# Altium PCB MGMEZZ04.PcbDoc (part 3 of 9)
Units mil, origin at the board's own origin, x right, y up, seen from the top; angles counter-clockwise.
Board outline 3790 x 5472.44 mil, 10 copper layers (TopLayer, InternalPlane1, MidLayer1, InternalPlane2, MidLayer2, MidLayer3, InternalPlane3, MidLayer4, InternalPlane4, BottomLayer), stack 57.08 mil thick; 846 components, 745 nets, 3323 pads, 1906 vias.
Unrouted connection lines stored in the file: 128.
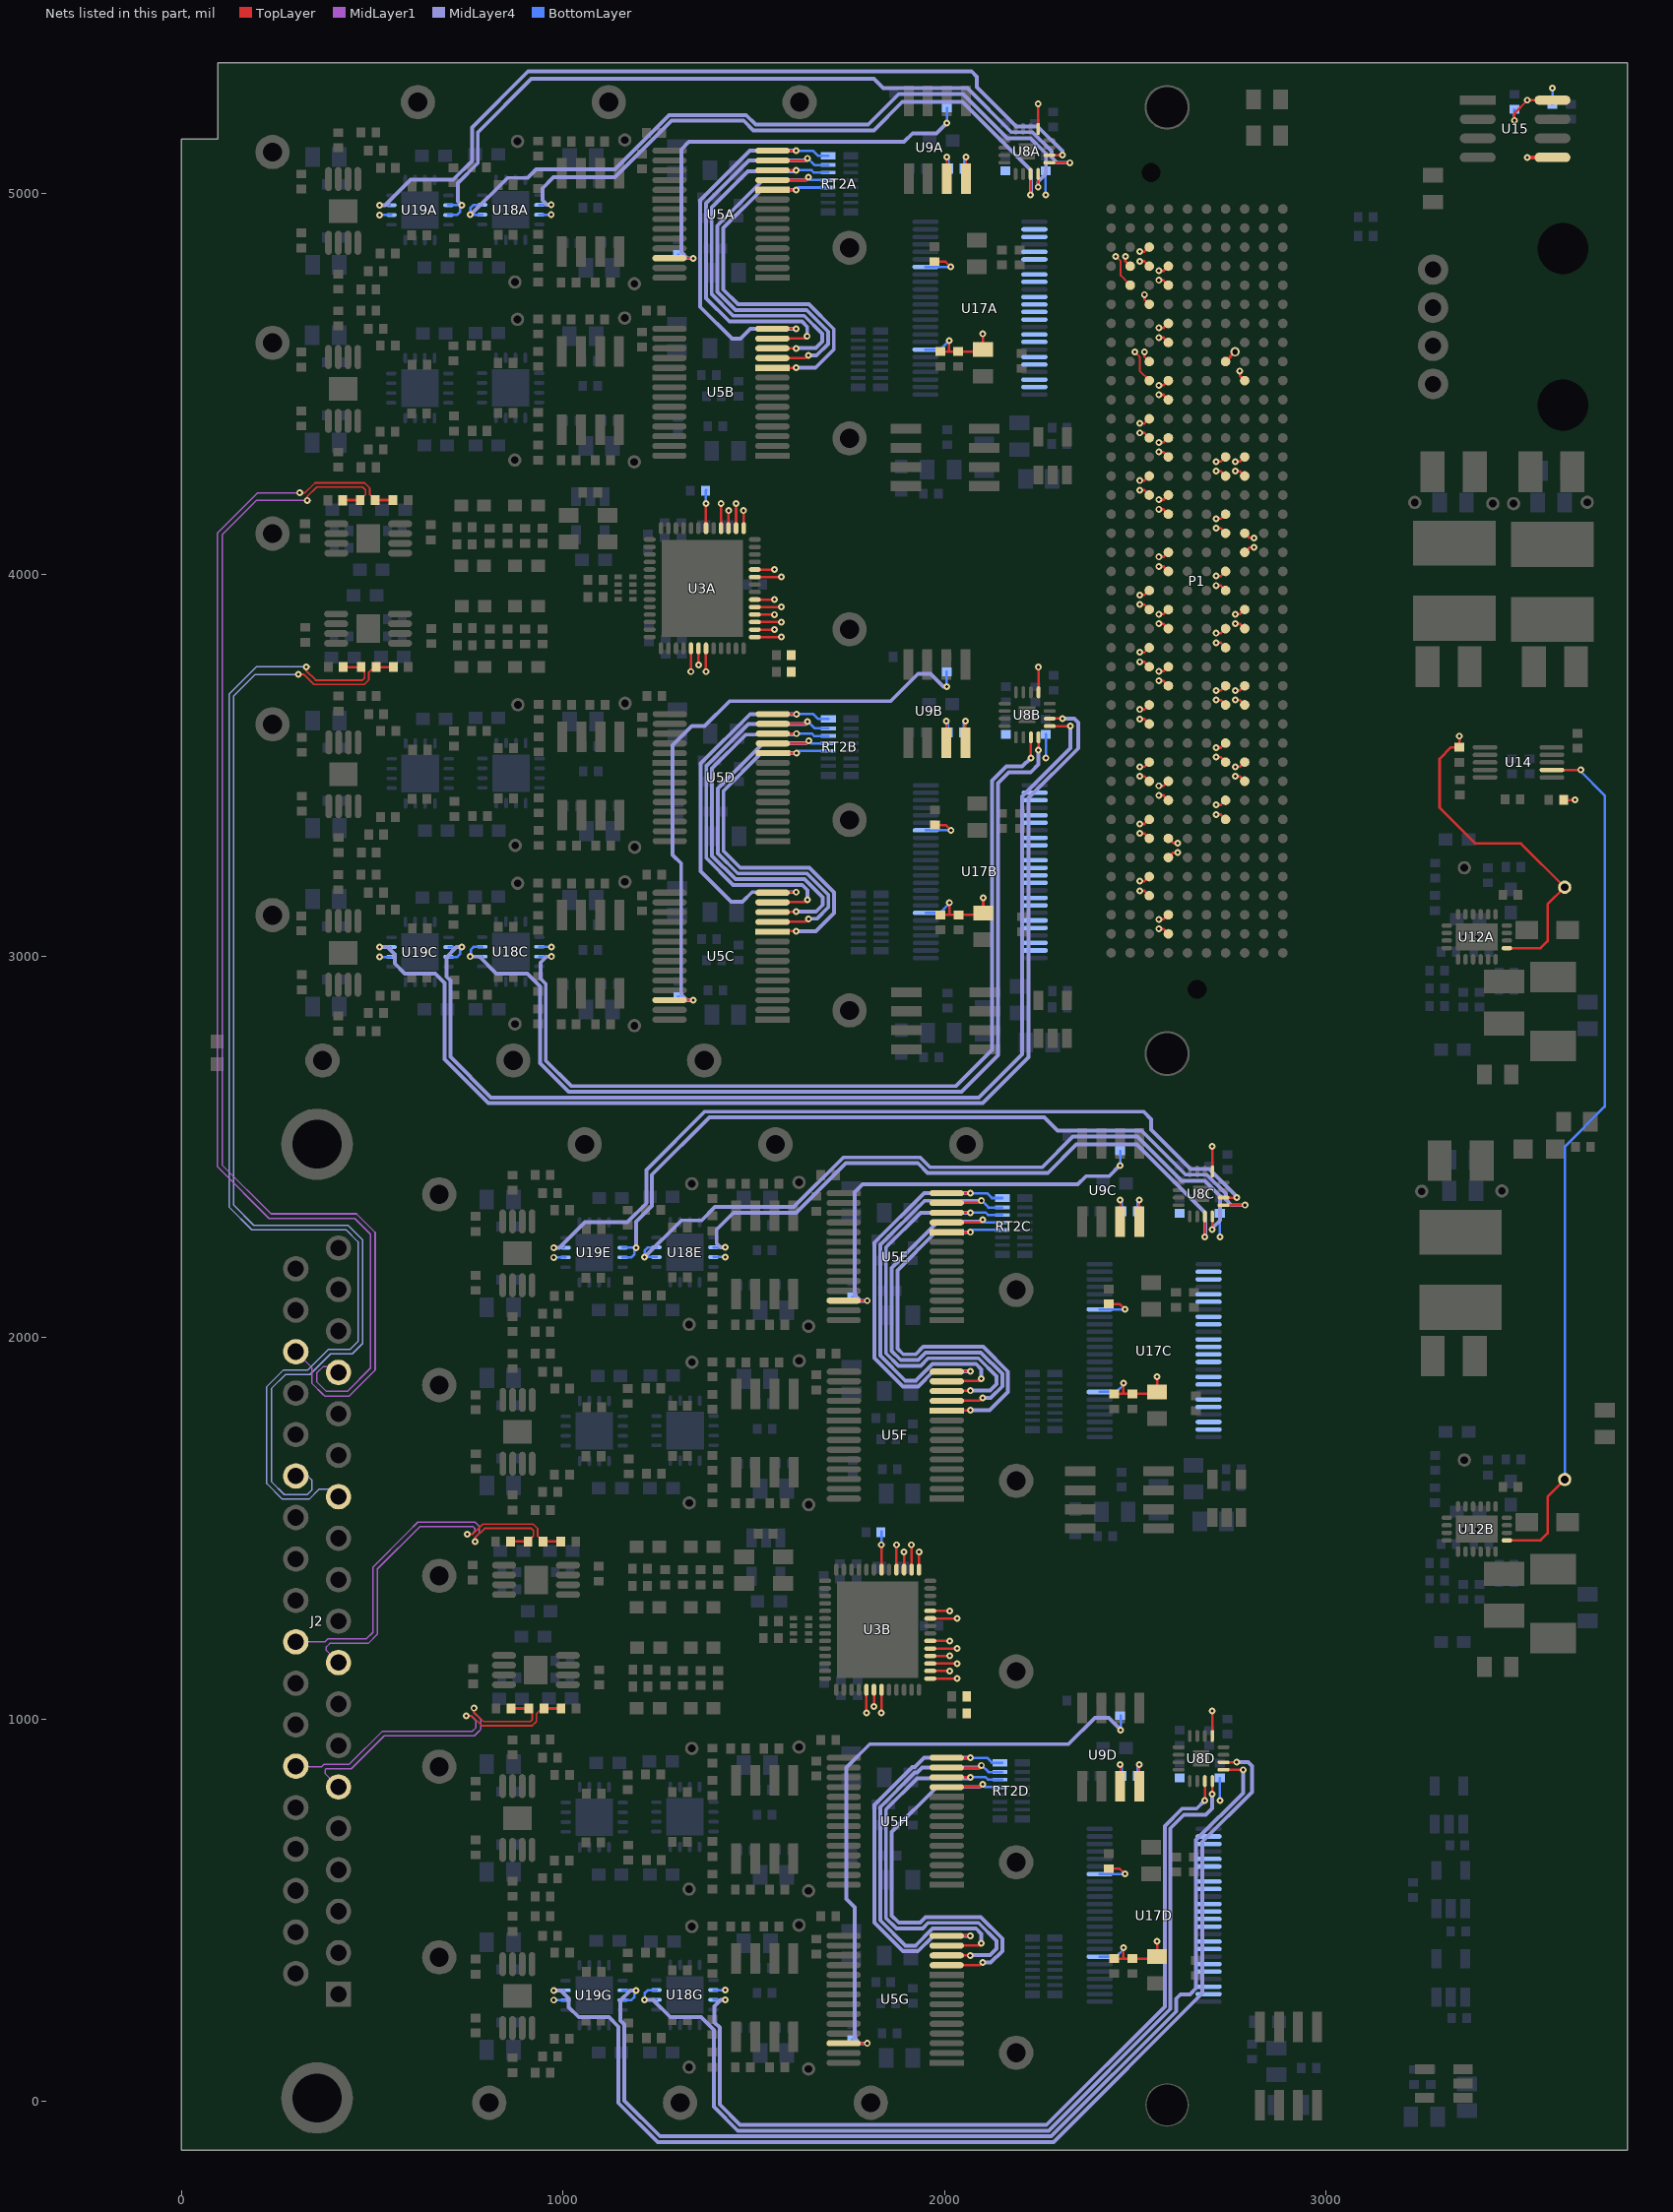
[diagram p11: the nets of this part, all layers, seen from the top]

## Footprints (in the part's own frame and the unit in brackets; to place one, negate y for a bottom-side part, rotate by r counter-clockwise, add the part's x,y. Pads: shape width x height; smd on the part's side, far side on the other; paste and mask are expansions set on the pad) (continued)
SOG.65M/28/WG8.20/L10.16 [mil]
  rect 16x90 smd: 1(0,-0.42) 10(230.4,-0.42) 20(204.8,269.58)
  oval 16x90 smd: 2(25.6,-0.42) 3(51.2,-0.42) 4(76.8,-0.42) 5(102.4,-0.42) 6(128,-0.42) 7(153.6,-0.42) 8(179.2,-0.42) 9(204.8,-0.42) 11(256,-0.42) 12(281.6,-0.42) 13(307.2,-0.42) 14(332.8,-0.42) 15(332.8,269.58) 16(307.2,269.58) 17(281.6,269.58) 18(256,269.58) 19(230.4,269.58) 21(179.2,269.58) 22(153.6,269.58) 23(128,269.58) 24(102.4,269.58) 25(76.8,269.58) 26(51.2,269.58) 27(25.6,269.58) 28(0,269.58)
  silkscreen extent -34,60 366,210
SOP8-EP-127P600-8N [mm] "SOP8 package for THS4131IDGNR"
  oval 1.6x0.45 smd: 1(-2.125,0.975) 2(-2.125,0.325) 3(-2.125,-0.325) 4(-2.125,-0.975) 5(2.125,-0.975) 6(2.125,-0.325) 7(2.125,0.325) 8(2.125,0.975)
  rect 1.57x1.89 smd: 9(0,0)
  silkscreen extent -2.25,-1.55 0.92,1.87, body extent -1.55,-1.55 1.55,1.55, height 1.1
SOT23-5 [mil]
  rect 26x50 smd: 1(-37.5,0) 2(0,0) 3(37.5,0) 4(37.5,100) 5(-37.5,100)
  silkscreen extent -83,-8 65,100
TANT4532 [mil]
  rect 80x120 smd: 1(-0.4,0.12) 2(179.6,0.12)
  silkscreen extent -83,-67 228,102
TP-3520-SK [mil]
  round 35 hole 20: 1(0,0)
  silkscreen extent -27,-27 27,28
TSSOP48-0.5mmpitch [mm] "TSSOP48-0.5mmpitch"
  oval 1.75x0.3 smd: 1(-3.625,5.75) 2(-3.625,5.25) 3(-3.625,4.75) 4(-3.625,4.25) 5(-3.625,3.75) 6(-3.625,3.25) 7(-3.625,2.75) 8(-3.625,2.25) 9(-3.625,1.75) 10(-3.625,1.25) 11(-3.625,0.75) 12(-3.625,0.25) 13(-3.625,-0.25) 14(-3.625,-0.75) 15(-3.625,-1.25) 16(-3.625,-1.75) 17(-3.625,-2.25) 18(-3.625,-2.75) 19(-3.625,-3.25) 20(-3.625,-3.75) 21(-3.625,-4.25) 22(-3.625,-4.75) 23(-3.625,-5.25) 24(-3.625,-5.75) 25(3.625,-5.75) 26(3.625,-5.25) 27(3.625,-4.75) 28(3.625,-4.25) 29(3.625,-3.75) 30(3.625,-3.25) 31(3.625,-2.75) 32(3.625,-2.25) 33(3.625,-1.75) 34(3.625,-1.25) 35(3.625,-0.75) 36(3.625,-0.25) 37(3.625,0.25) 38(3.625,0.75) 39(3.625,1.25) 40(3.625,1.75) 41(3.625,2.25) 42(3.625,2.75) 43(3.625,3.25) 44(3.625,3.75) 45(3.625,4.25) 46(3.625,4.75) 47(3.625,5.25) 48(3.625,5.75)
  silkscreen extent -3.75,-6.3 2.35,6.57, body extent -3.1,-6.3 3.1,6.3, height 1.2
TSSOP50P490X110-10N [mm] "TSSOP, 10-Leads, Body 3.00x3.00mm, Pitch 0.50mm, IPC Medium Density"
  oval 1.65x0.3 smd: 1(-2.225,1) 2(-2.225,0.5) 3(-2.225,0) 4(-2.225,-0.5) 5(-2.225,-1) 6(2.225,-1) 7(2.225,-0.5) 8(2.225,0) 9(2.225,0.5) 10(2.225,1)
  silkscreen extent -2.35,-1.55 1,1.82, body extent -1.55,-1.55 1.55,1.55, height 1.1

## Part data
AmpN1A AmpN1B AmpN1C AmpN1D AmpN1E AmpN1F AmpN1G AmpN1H AmpP1A AmpP1B AmpP1C AmpP1D AmpP1E AmpP1F AmpP1G AmpP1H BuckSyncA BuckSyncB In1 In2 IoutA1A IoutA1B IoutA1C IoutA1D IoutA1E IoutA1F IoutA1G IoutA1H IoutB1A IoutB1B IoutB1C IoutB1D IoutB1E IoutB1F IoutB1G IoutB1H Ip1 Ip2 Ip3 Ip4 TMON2A TMON2B: "TestPoint1"
C1A C1B C4A C4B C6A C6B C9A C9B C12A C12B C23A C23B C28A C28B C29A C29B C65A C65B C67A C67B C68A C68B C69A C69B C77A C77B C77C C77D C88A C88B C88C C88D C88E C88F C88G C88H C90A C90B C90C C90D C90E C90F C90G C90H C92A C92B C92C C92D C92E C92F C92G C92H C94A C94B C94C C94D C94E C94F C94G C94H: library part "CAP 0603", "Capacitor, Ceramic, 0603"
C2A C2B C3A C3B C7A C7B C8A C8B C10A C10B C11A C11B C14A C14B C15A C15B C16A C16B C17A C17B C18A C18B C19A C19B C24A C24B C30A C30B C32A C32B C33A C33B C34A C34B C35A C35B C36A C36B C36C C36D C36E C36F C36G C36H C37A C37B C37C C37D C37E C37F C37G C37H C40A C40B C40C C40D C40E C40F C40G C40H C44A C44B C44C C44D C44E C44F C44G C44H C46A C46B C46C C46D C46E C46F C46G C46H C48A C48B C48C C48D C48E C48F C48G C48H C50A C50B C50C C50D C50E C50F C50G C50H C51A C51B C51C C51D C52A C52B C52C C52D C54 C57A C57B C58 C59A C59B C60 C63 C72 C73 C80A C80B C80C C80D C80E C80F C80G C80H C89A C89B C89C C89D C89E C89F C89G C89H C91A C91B C91C C91D C91E C91F C91G C91H C93A C93B C93C C93D C93E C93F C93G C93H C95A C95B C95C C95D C95E C95F C95G C95H C97A C97B C97C C97D C97E C97F C97G C97H C99 C104 C115A C115B C115C C115D C117A C117B C117C C117D: library part "CAP 0603", "Capacitor, Ceramic, 0402"
C5A C5B C13A C13B C43A C43B C43C C43D C43E C43F C43G C43H C45A C45B C45C C45D C45E C45F C45G C45H C47A C47B C47C C47D C47E C47F C47G C47H C49A C49B C49C C49D C49E C49F C49G C49H C53A C53B C53C C53D C55A C55B C55C C55D C83A C83B C83C C83D C83E C83F C83G C83H C96A C96B C96C C96D C96E C96F C96G C96H C98A C98B C98C C98D C98E C98F C98G C98H C102A C102B C102C C102D C110A C110B C110C C110D C114A C114B C114C C114D C116A C116B C116C C116D: library part "CAP 0805", "Capacitor, Ceramic, 0805"
C20A C20B C21A C21B C22A C22B C25A C25B C26A C26B C27A C27B C38A C38B C38C C38D C38E C38F C38G C38H C39A C39B C39C C39D C39E C39F C39G C39H C41A C41B C41C C41D C41E C41F C41G C41H C42A C42B C42C C42D C42E C42F C42G C42H C62A C62B C66A C66B: library part "CAP 0402", "Capacitor, Ceramic, 0603"
C31A C31B: library part CapArray0805, "2.2uFx4 4V 0805 Cap Array"
C56A C56B C78 C79 C81 C82 C100 C101: library part "CAP 1210", "Capacitor, Ceramic, 1210"
C61A C61B: library part CAP4532, "33u, 16V, 20%, 4532C, X5R"
C84A C84B C84C C84D C85A C85B C85C C85D C86A C86B C86C C86D C87A C87B C87C C87D: library part "CAP 0402", "Capacitor, Ceramic, 0402"
DP1: library part "LED, yellow, 0805, 2mA", "LED"
J2: "DB37F"
L1A L1B L2A L2B L3A L3B L4A L4B L5A L5B L6A L6B L7A L7B L8A L8B: library part "IND 0603", "Inductor 0603"
L9 L12 L13: library part INDPM54, "Inductor PM54"
L10A L10B: library part "IND IHLP1212", "Inductor IHLP1212"
P1: "Samtec ASP-134602-01"
P2: library part "Molex 4pin header - 0705550038", "Molex 4pin header - 0705550038"
R1A R1B R2A R2B R3A R3B R4A R4B R5A R5B R6A R6B R7A R7B R8A R8B R9A R9B R10A R10B R11A R11B R12A R12B R13A R13B R14A R14B R15A R15B R16A R16B R17A R17B R18A R18B R18C R18D R18E R18F R18G R18H R19A R19B R19C R19D R19E R19F R19G R19H R20A R20B R20C R20D R20E R20F R20G R20H R21 R22A R22B R22C R22D R22E R22F R22G R22H R23A R23B R23C R23D R23E R23F R23G R23H R24A R24B R24C R24D R24E R24F R24G R24H R25 R26A R26B R26C R26D R26E R26F R26G R26H R27A R27B R27C R27D R28A R28B R28C R28D R29A R29B R29C R29D R29E R29F R29G R29H R30A R30B R30C R30D R30E R30F R30G R30H R31 R32 R33A R33B R33C R33D R33E R33F R33G R33H R34A R34B R34C R34D R34E R34F R34G R34H R35A R35B R35C R35D R35E R35F R35G R35H R37A R37B R37C R37D R38A R38B R38C R38D R40A R40B R40C R40D R41A R41B R41C R41D R42A R42B R42C R42D R43A R43B R43C R43D R44A R44B R44C R44D R45A R45B R45C R45D R46A R46B R46C R46D R47A R47B R47C R47D R48 R50A R50B R52 R53A R53B R54A R54B R56 R57A R57B R59A R59B R61A R61B R62 R63A R63B R65A R65B R68 R95A R95B R95C R95D R95E R95F R95G R95H R96A R96B R96C R96D R96E R96F R96G R96H R97A R97B R97C R97D R97E R97F R97G R97H R98A R98B R98C R98D R98E R98F R98G R98H R99A R99B R99C R99D R99E R99F R99G R99H R100A R100B R100C R100D R100E R100F R100G R100H R101A R101B R101C R101D R101E R101F R101G R101H R102A R102B R102C R102D R102E R102F R102G R102H R103A R103B R103C R103D R103E R103F R103G R103H R104A R104B R104C R104D R104E R104F R104G R104H Rfb1A Rfb1B Rfb3A Rfb3B: library part "RES 0402", "Resistor"
R39A R39B R39C R39D: library part "RES 0603", "Resistor"
R49A R49B R51A R51B R58A R58B R70 R73 R74 R75: library part Res1812, "RES 0.0 OHM 1/8W 0805 SMD"
R55: library part "RES 0603", "RES 0603"
R71 R76 R77: library part "RES 0805", "RES 0.1 OHM 1/8W 0805 SMD"
R78: library part "RES 0805", "RES 0.0 OHM 1/8W 0805 SMD"
RT1A RT1B RT1C RT1D RT2A RT2B RT2C RT2D: library part Res_Pack, "RES ARRAY 47 OHM SMD"
Shield1 Shield2: library part 14RA-CBS-1.5x2.5, "14RA-CBS-1.5x2.5 Shield (Assembled fence + cover)"
U1A U1B: library part TPS73618DBVR, "Fixed 1.8V 10uVrms noise 400mA regulator"
U2A U2B U4A U4B U7A U7B U7C U7D U7E U7F U7G U7H: "IC OPAMP DIFF 225MHZ SGL 8MSOP"
U3A U3B: "LTC2192 -ADC"
U6A U6B U6C U6D U6E U6F U6G U6H: "Dual R-R Opamp Soic 8 165Mhz GBP"
U8A U8B U8C U8D: "IO expander 8bit I2C"
U9A U9B U9C U9D: library part ICS83023AMILF, "LVDS to single ended"
U10A U10B U10C U10D: "Adjustable 30uVrms noise 400mA regulator"
U11A U11B U11C U11D: "REG, negative micropower low dropout"
U12A U12B: "20V, 2.5A Sync buck, 3Mhz"
U13 U16: "LVDS Driver"
U14: "Comparator with two supplies"
U15: library part AT24C1024B, "IC EEPROM 1MBIT 1MHZ 8SOIC"
U17A U17B U17C U17D: library part "SN74ALVC164245DGGR Transciever", "SN74ALVC164245DGGR Transciever"
U18A U18B U18C U18D U18E U18F U18G U18H U19A U19B U19C U19D U19E U19F U19G U19H: "Switch 4 SPST-NO - VQFN package"
U20: "LVDS Receiver"

## Free pads (board coordinates)
  round 118.11 hole 106.3: 4(2583.27,5225.39) 5(2583.27,2745.08)
  round 114.17 hole 106.3: 6(2583.27,-10.83)

## Via types
v1: diameter 18, hole 8, TopLayer to BottomLayer, 1296 vias
v2: diameter 18, hole 8, TopLayer to BottomLayer, tented both sides, 203 vias
v3: diameter 19.68, hole 7.87, TopLayer to BottomLayer, 188 vias
v4: diameter 25, hole 15, TopLayer to BottomLayer, tented both sides, 99 vias
v5: diameter 25, hole 15, TopLayer to BottomLayer, 72 vias
v6: diameter 35, hole 20, TopLayer to BottomLayer, 48 vias

## Nets (pads, with @x,y where several pads share a name; then routed paths per layer and width w, separated by ;. In a path a pad name is that pad's centre, name@x,y a point inside that pad or via, vN(x,y) a via of type N, cw(c..) or ccw(c..) an arc to the next point about the centre after c; other vN are vias at no path point)
3V3AUX: C99.1 P1.D32 R21.1 U15.8 | length 240
  TopLayer w6.5: v1(3493,5191.03) 3493,5209.5 3527.5,5244 v1(3527.03,5244) U15.8@3593,5244
  TopLayer w8: P1.D32@2736.34,4559.33 v4(2761.34,4584.33)
  BottomLayer w6.5: v1(3493,5191.03) C99.1@3493,5220 ; R21.1@3593,5233.37 v1(3593,5275.34)
+2.5VD: R62.1 | length 29.4
  TopLayer w6.5: R62.1@3622.37,3409.84 v1(3651.8,3409.84)
+5VD: C84A.2 C84B.2 C84C.2 C84D.2 C86A.2 C86B.2 C86C.2 C86D.2 C116A.2 C116B.2 C116C.2 C116D.2 C117A.2 C117B.2 C117C.2 C117D.2 U17A.7 U17A.18 U17B.7 U17B.18 U17C.7 U17C.18 U17D.7 U17D.18 | length 1480.4
  TopLayer w6.5: C84A.2@1973.96,4820.85 2002.04,4820.85 v1(2016,4806.89) ; C84B.2@1974.77,3344.19 2002.85,3344.19 v1(2016.81,3330.23) ; C86A.2@1988.5,4585.22 2012,4585.22 ; C86B.2@1989.32,3108.56 2012.81,3108.56 ; v1(2012,4614) 2012,4585.22 ; v1(2012.81,3140.34) 2012.81,3108.56 ; v1(2100.5,4631.24) C116A.2@2100.5,4590.22 2095.5,4585.22 C117A.2@2035.5,4585.22 2012,4585.22 ; v1(2101.32,3153.58) C116B.2@2101.32,3113.56 2096.32,3108.56 C117B.2@2036.32,3108.56 2012.81,3108.56 ; C84D.2@2430.46,608.54 2458.54,608.54 v1(2472.5,594.58) ; C84C.2@2430.46,2088.54 2458.54,2088.54 v1(2472.5,2074.58) ; C86D.2@2445.01,372.91 2468.5,372.91 ; C86C.2@2445.01,1852.91 2468.5,1852.91 ; v1(2468.5,401.69) 2468.5,372.91 ; v1(2468.5,1881.69) 2468.5,1852.91 ; v1(2557.01,417.93) C116D.2@2557.01,377.91 2552.01,372.91 C117D.2@2492.01,372.91 2468.5,372.91 ; v1(2557.01,1897.93) C116C.2@2557.01,1857.91 2552.01,1852.91 C117C.2@2492.01,1852.91 2468.5,1852.91
  BottomLayer w6.5: U17A.7@1950,4590.35 1988.35,4590.35 2007,4609 v1@2012,4609 ; U17A.18@1950,4806.89 v1(2016,4806.89) ; U17B.7@1950.81,3113.69 1987.4,3113.69 v1@2013.43,3139.72 ; U17B.18@1950.81,3330.23 v1(2016.81,3330.23) ; U17D.7@2406.5,378.05 2449.86,378.05 v1@2471,399.19 ; U17D.18@2406.5,594.58 v1(2472.5,594.58) ; U17C.7@2406.5,1858.05 2449.86,1858.05 v1@2471,1879.19 ; U17C.18@2406.5,2074.58 v1(2472.5,2074.58)
\SDA: P1.C31 R38A.2 R38B.2 R38C.2 R38D.2 R42A.2 R42B.2 R42C.2 R42D.2 U8A.13 U8B.13 U8C.13 U8D.13 U15.5 | length 604.4
  TopLayer w6.5: U8A.13@2245.17,5168.63 v1(2245.17,5234.5) ; U8B.13@2245.98,3691.97 v1(2245.98,3757.84) ; U8D.13@2701.67,956.32 v1(2701.67,1022.2) ; U8C.13@2701.67,2436.32 v1(2701.67,2502.2) ; v2(2773.84,4534.33) 2773.84,4521.83 P1.C31@2786.34,4509.33
  TopLayer w10: v1(3527.03,5094) U15.5@3593,5094
  BottomLayer w6.5: R38A.2@2264.65,5058.58 v1@2264.85,4996.64 ; R38B.2@2265.46,3581.92 v1(2265.67,3519.98) ; R38D.2@2721.15,846.27 v1(2721.36,787.33) ; R38C.2@2721.15,2326.27 v1(2721.36,2264.33)
  other v1: 2264.85,4995.64
ADC0_OUT.ADR.ADR_N: P1.G7 | length 30.2
  TopLayer w6.5: P1.G7@2586.34,3309.33 2598.84,3296.83 v2(2611.34,3296.83)
ADC0_OUT.ADR.ADR_P: P1.G6 | length 30.2
  TopLayer w6.5: P1.G6@2586.34,3259.33 2598.84,3271.83 v2(2611.34,3271.83)
ADC0_OUT.AH.D0_N: P1.H5 | length 30.2
  TopLayer w6.5: v2(2511.34,3196.83) 2523.84,3196.83 P1.H5@2536.34,3209.33
ADC0_OUT.AH.D0_P: P1.H4 | length 30.2
  TopLayer w6.5: v2(2511.34,3171.83) 2523.84,3171.83 P1.H4@2536.34,3159.33
ADC0_OUT.AH.D1_N: P1.C11 | length 30.2
  TopLayer w6.5: v2(2761.34,3496.83) 2773.84,3496.83 P1.C11@2786.34,3509.33
ADC0_OUT.AH.D1_P: P1.C10 | length 30.2
  TopLayer w6.5: v2(2761.34,3471.83) 2773.84,3471.83 P1.C10@2786.34,3459.33
ADC0_OUT.AH.D2_N: P1.H14 | length 30.2
  TopLayer w6.5: v2(2511.34,3646.83) 2523.84,3646.83 P1.H14@2536.34,3659.33
ADC0_OUT.AH.D2_P: P1.H13 | length 30.2
  TopLayer w6.5: v2(2511.34,3621.83) 2523.84,3621.83 P1.H13@2536.34,3609.33
ADC0_OUT.AH.D3_N: P1.D12 | length 30.2
  TopLayer w6.5: v2(2711.34,3546.83) 2723.84,3546.83 P1.D12@2736.34,3559.33
ADC0_OUT.AH.D3_P: P1.D11 | length 30.2
  TopLayer w6.5: v2(2711.34,3521.83) 2723.84,3521.83 P1.D11@2736.34,3509.33
ADC0_OUT.AH.D4_N: P1.D15 | length 30.2
  TopLayer w6.5: v2(2711.34,3696.83) 2723.84,3696.83 P1.D15@2736.34,3709.33
ADC0_OUT.AH.D4_P: P1.D14 | length 30.2
  TopLayer w6.5: v2(2711.34,3671.83) 2723.84,3671.83 P1.D14@2736.34,3659.33
ADC0_OUT.AH.D5_N: P1.G19 | length 30.2
  TopLayer w6.5: v2(2561.34,3896.83) 2573.84,3896.83 P1.G19@2586.34,3909.33
ADC0_OUT.AH.D5_P: P1.G18 | length 30.2
  TopLayer w6.5: v2(2561.34,3871.83) 2573.84,3871.83 P1.G18@2586.34,3859.33
ADC0_OUT.AH.D6_N: P1.H8 | length 30.2
  TopLayer w6.5: v2(2511.34,3346.83) 2523.84,3346.83 P1.H8@2536.34,3359.33
ADC0_OUT.AH.D6_P: P1.H7 | length 30.2
  TopLayer w6.5: v2(2511.34,3321.83) 2523.84,3321.83 P1.H7@2536.34,3309.33
ADC0_OUT.AH.D7_N: P1.C15 | length 30.2
  TopLayer w6.5: v2(2761.34,3696.83) 2773.84,3696.83 P1.C15@2786.34,3709.33
ADC0_OUT.AH.D7_P: P1.C14 | length 30.2
  TopLayer w6.5: v2(2761.34,3671.83) 2773.84,3671.83 P1.C14@2786.34,3659.33
ADC0_OUT.BDR.BDR_N: P1.G3 | length 30.2
  TopLayer w6.5: v2(2561.34,3096.83) 2573.84,3096.83 P1.G3@2586.34,3109.33
ADC0_OUT.BDR.BDR_P: P1.G2 | length 30.2
  TopLayer w6.5: v2(2561.34,3071.83) 2573.84,3071.83 P1.G2@2586.34,3059.33
ADC0_OUT.BH.D0_N: P1.D9 | length 30.2
  TopLayer w6.5: v2(2711.34,3396.83) 2723.84,3396.83 P1.D9@2736.34,3409.33
ADC0_OUT.BH.D0_P: P1.D8 | length 30.2
  TopLayer w6.5: v2(2711.34,3371.83) 2723.84,3371.83 P1.D8@2736.34,3359.33
ADC0_OUT.BH.D1_N: P1.G16 | length 30.2
  TopLayer w6.5: v2(2561.34,3746.83) 2573.84,3746.83 P1.G16@2586.34,3759.33
ADC0_OUT.BH.D1_P: P1.G15 | length 30.2
  TopLayer w6.5: v2(2561.34,3721.83) 2573.84,3721.83 P1.G15@2586.34,3709.33
ADC0_OUT.BH.D2_N: P1.H17 | length 30.2
  TopLayer w6.5: v2(2511.34,3796.83) 2523.84,3796.83 P1.H17@2536.34,3809.33
ADC0_OUT.BH.D2_P: P1.H16 | length 30.2
  TopLayer w6.5: v2(2511.34,3771.83) 2523.84,3771.83 P1.H16@2536.34,3759.33
ADC0_OUT.BH.D3_N: P1.C19 | length 30.2
  TopLayer w6.5: v2(2761.34,3896.83) 2773.84,3896.83 P1.C19@2786.34,3909.33
ADC0_OUT.BH.D3_P: P1.C18 | length 30.2
  TopLayer w6.5: v2(2761.34,3871.83) 2773.84,3871.83 P1.C18@2786.34,3859.33
ADC0_OUT.BH.D4_N: P1.D18 | length 30.2
  TopLayer w6.5: v2(2711.34,3846.83) 2723.84,3846.83 P1.D18@2736.34,3859.33
ADC0_OUT.BH.D4_P: P1.D17 | length 30.2
  TopLayer w6.5: v2(2711.34,3821.83) 2723.84,3821.83 P1.D17@2736.34,3809.33
ADC0_OUT.BH.D5_N: P1.H20 | length 30.2
  TopLayer w6.5: v2(2511.34,3946.83) 2523.84,3946.83 P1.H20@2536.34,3959.33
ADC0_OUT.BH.D5_P: P1.H19 | length 30.2
  TopLayer w6.5: v2(2511.34,3921.83) 2523.84,3921.83 P1.H19@2536.34,3909.33
ADC0_OUT.BH.D6_N: P1.G10 | length 30.2
  TopLayer w6.5: v2(2561.34,3446.83) 2573.84,3446.83 P1.G10@2586.34,3459.33
ADC0_OUT.BH.D6_P: P1.G9 | length 30.2
  TopLayer w6.5: v2(2561.34,3421.83) 2573.84,3421.83 P1.G9@2586.34,3409.33
ADC0_OUT.BH.D7_N: P1.H11 | length 30.2
  TopLayer w6.5: v2(2511.34,3496.83) 2523.84,3496.83 P1.H11@2536.34,3509.33
ADC0_OUT.BH.D7_P: P1.H10 | length 30.2
  TopLayer w6.5: v2(2511.34,3471.83) 2523.84,3471.83 P1.H10@2536.34,3459.33
ADC0_OUT.CDR.CDR_N: P1.C23 | length 30.2
  TopLayer w6.5: P1.C23@2786.34,4109.33 2798.84,4096.83 v2(2811.34,4096.83)
ADC0_OUT.CDR.CDR_P: P1.C22 | length 30.2
  TopLayer w6.5: P1.C22@2786.34,4059.33 2798.84,4071.83 v2(2811.34,4071.83)
ADC0_OUT.CH.D2_N: P1.G31 | length 30.2
  TopLayer w6.5: v2(2561.34,4496.83) 2573.84,4496.83 P1.G31@2586.34,4509.33
ADC0_OUT.CH.D2_P: P1.G30 | length 30.2
  TopLayer w6.5: v2(2561.34,4471.83) 2573.84,4471.83 P1.G30@2586.34,4459.33
ADC0_OUT.CH.D3_N: P1.G34 | length 30.2
  TopLayer w6.5: v2(2561.34,4646.83) 2573.84,4646.83 P1.G34@2586.34,4659.33
ADC0_OUT.CH.D3_P: P1.G33 | length 30.2
  TopLayer w6.5: v2(2561.34,4621.83) 2573.84,4621.83 P1.G33@2586.34,4609.33
ADC0_OUT.CH.D4_N: P1.H38 | length 30.2
  TopLayer w6.5: v2(2511.34,4846.83) 2523.84,4846.83 P1.H38@2536.34,4859.33
ADC0_OUT.CH.D4_P: P1.H37 | length 30.2
  TopLayer w6.5: v2(2511.34,4821.83) 2523.84,4821.83 P1.H37@2536.34,4809.33
ADC0_OUT.CH.D5_N: P1.H29 | length 30.2
  TopLayer w6.5: v2(2511.34,4396.83) 2523.84,4396.83 P1.H29@2536.34,4409.33
ADC0_OUT.CH.D5_P: P1.H28 | length 30.2
  TopLayer w6.5: v2(2511.34,4371.83) 2523.84,4371.83 P1.H28@2536.34,4359.33
ADC0_OUT.CH.D6_N: P1.G37 | length 30.2
  TopLayer w6.5: v2(2561.34,4796.83) 2573.84,4796.83 P1.G37@2586.34,4809.33
ADC0_OUT.CH.D6_P: P1.G36 | length 30.2
  TopLayer w6.5: v2(2561.34,4771.83) 2573.84,4771.83 P1.G36@2586.34,4759.33
ADC0_OUT.CH.D7_N: P1.D27 | length 30.2
  TopLayer w6.5: v2(2711.34,4296.83) 2723.84,4296.83 P1.D27@2736.34,4309.33
ADC0_OUT.CH.D7_P: P1.D26 | length 30.2
  TopLayer w6.5: v2(2711.34,4271.83) 2723.84,4271.83 P1.D26@2736.34,4259.33
ADC0_OUT.DDR.DDR_N: P1.D21 | length 30.2
  TopLayer w6.5: v2(2711.34,3996.83) 2723.84,3996.83 P1.D21@2736.34,4009.33
ADC0_OUT.DDR.DDR_P: P1.D20 | length 30.2
  TopLayer w6.5: v2(2711.34,3971.83) 2723.84,3971.83 P1.D20@2736.34,3959.33
ADC0_OUT.DH.D3_N: P1.C27 | length 30.2
  TopLayer w6.5: v2(2761.34,4296.83) 2773.84,4296.83 P1.C27@2786.34,4309.33
ADC0_OUT.DH.D3_P: P1.C26 | length 30.2
  TopLayer w6.5: v2(2761.34,4271.83) 2773.84,4271.83 P1.C26@2786.34,4259.33
ADC0_OUT.DH.D4_N: P1.H26 | length 30.2
  TopLayer w6.5: v2(2511.34,4246.83) 2523.84,4246.83 P1.H26@2536.34,4259.33
ADC0_OUT.DH.D4_P: P1.H25 | length 30.2
  TopLayer w6.5: v2(2511.34,4221.83) 2523.84,4221.83 P1.H25@2536.34,4209.33
ADC0_OUT.DH.D5_N: P1.D24 | length 30.2
  TopLayer w6.5: v2(2711.34,4146.83) 2723.84,4146.83 P1.D24@2736.34,4159.33
ADC0_OUT.DH.D5_P: P1.D23 | length 30.2
  TopLayer w6.5: v2(2711.34,4121.83) 2723.84,4121.83 P1.D23@2736.34,4109.33
ADC0_OUT.DH.D6_N: P1.G25 | length 30.2
  TopLayer w6.5: v2(2561.34,4196.83) 2573.84,4196.83 P1.G25@2586.34,4209.33
ADC0_OUT.DH.D6_P: P1.G24 | length 30.2
  TopLayer w6.5: v2(2561.34,4171.83) 2573.84,4171.83 P1.G24@2586.34,4159.33
ADC0_OUT.DH.D7_N: P1.G22 | length 30.2
  TopLayer w6.5: v2(2561.34,4046.83) 2573.84,4046.83 P1.G22@2586.34,4059.33
ADC0_OUT.DH.D7_P: P1.G21 | length 30.2
  TopLayer w6.5: v2(2561.34,4021.83) 2573.84,4021.83 P1.G21@2586.34,4009.33
ADC_CS_WIRE1: P1.G27 U3A.19 | length 92.1
  TopLayer w6.5: v1(1335.55,3746.15) U3A.19@1335.55,3808.05 ; v2(2561.34,4321.83) 2573.84,4321.83 P1.G27@2586.34,4309.33
ADC_CS_WIRE2: P1.H35 U3B.19 | length 92.1
  TopLayer w6.5: v1(1795.24,1016.5) U3B.19@1795.24,1078.4 ; v2(2523.84,4734.33) 2523.84,4721.83 P1.H35@2536.34,4709.33
ADCIN1A_N: J2.16 R3A.1 R4A.2 | length 3309.8
  TopLayer w4.5: v1(310,4215) 324.44,4215 350.44,4241 479.78,4241 493.99,4226.79 493.99,4209.89 R4A.2@508.11,4195.77
  TopLayer w6.5: R4A.2@508.11,4195.77 R3A.1@554.74,4195.77
  MidLayer1 w4: 320,4215 200,4215 130,4145 95,4110 95,2448.03 230.03,2313 454.3,2313 496,2271.3 496,1920.46 435,1859.46 380.54,1859.46 354.76,1885.24 354.76,1907.39 372.37,1925 396.2,1925 J2.16@411.81,1909.39
ADCIN1A_P: J2.35 R4A.1 R6A.1 | length 3320.3
  TopLayer w4.5: v1(330,4195) 330,4205 355,4230 475.23,4230 482.99,4222.23 482.99,4210.02 R4A.1@468.74,4195.77
  TopLayer w6.5: R6A.1@423.11,4195.05 423.83,4195.77 R4A.1@468.74,4195.77
  MidLayer1 w4: J2.35@300,1963.68 342.76,1920.92 342.76,1880.27 372.06,1850.97 375.57,1847.46 439.97,1847.46 443.49,1850.97 508,1915.49 508,2276.27 459.27,2325 235,2325 107,2453 107,4105.03 196.97,4195 340,4195
ADCIN1B_N: J2.9 R3B.1 R4B.2 | length 1120.9
  TopLayer w4.5: v1(749.69,1485.35) 764.13,1485.35 790.13,1511.35 ; 919.47,1511.35 790.13,1511.35 ; R4B.2@947.8,1466.12 933.68,1480.24 933.68,1499.84 930.39,1503.13 922.17,1511.35 790.13,1511.35
  TopLayer w6.5: R4B.2@947.8,1466.12 R3B.1@994.43,1466.12
  MidLayer1 w4: J2.9@411.81,1148.76 380,1180.57 380,1190 389,1199 489.97,1199 514,1223.03 514,1394 624.63,1504.63 764.9,1504.63 769.41,1500.12 769.41,1493.56 761.2,1485.35 v1(749.69,1485.35)
ADCIN1B_P: J2.28 R4B.1 R6B.1 | length 1137.5
  TopLayer w4.5: v1(769.69,1465.35) 769.69,1475.35 794.69,1500.35 ; R4B.1@908.43,1466.12 922.68,1480.37 922.68,1495.29 917.62,1500.35 794.69,1500.35 ; 914.92,1500.35 794.69,1500.35
  TopLayer w6.5: R6B.1@862.8,1465.4 863.52,1466.12 R4B.1@908.43,1466.12
  MidLayer1 w4: J2.28@300,1203.05 376.08,1203.05 384.03,1211 485,1211 502,1228 502,1398.97 593.03,1490 619.66,1516.63 769.87,1516.63 781.41,1505.09 781.41,1488.59 769.69,1476.87 v1(769.69,1465.35)
ADCIN2A_N: J2.13 R11A.1 R12A.2 | length 3246
  TopLayer w4.5: v1(327.06,3758.87) 327.06,3748.87 352.06,3723.87 474.98,3723.87 480.05,3728.94 480.05,3743.85 R12A.2@465.8,3758.1
  TopLayer w6.5: R11A.1@424.54,3758.1 465.8,3758.1 R12A.2@471.17,3758.1
  MidLayer4 w4: 337.06,3758.87 196.9,3758.87 146.51,3708.49 125,3686.97 125,2343.03 185.03,2283 431.76,2283 463,2251.76 463,1989.97 443.03,1970 386.03,1970 332.03,1916 268.03,1916 224,1871.97 224,1618.03 265.03,1577 334.97,1577 360.97,1603 392.21,1603 J2.13@411.81,1583.4
ADCIN2A_P: J2.32 R12A.1 R14A.1 | length 3199.5
  TopLayer w4.5: v1(307.06,3738.87) 321.5,3738.87 347.5,3712.87 479.54,3712.87 487.76,3721.09 491.05,3724.38 491.05,3743.98 R12A.1@505.17,3758.1
  TopLayer w6.5: R12A.1@510.54,3758.1 R14A.1@555.45,3758.1 R14A.1@556.17,3758.82
  MidLayer4 w4: J2.32@300,1637.69 331.31,1637.69 342,1627 342,1601 330,1589 270,1589 236,1623 236,1867 273,1904 337,1904 391,1958 448,1958 475,1985 475,2256.73 436.73,2295 190,2295 137,2348 137,3682 193.87,3738.87 317.06,3738.87
ADCIN2B_N: J2.6 R11B.1 R12B.2 | length 831.3
  TopLayer w4.5: v1(766.75,1029.22) 766.75,1019.22 791.75,994.22 914.67,994.22 919.74,999.29 919.74,1014.21 R12B.2@905.49,1028.46
  TopLayer w6.5: R11B.1@864.23,1028.46 905.49,1028.46 R12B.2@910.86,1028.46
  MidLayer1 w4: J2.6@411.81,822.77 376.49,858.1 376.49,867.51 379.46,870.49 445.49,870.49 449,874 532,957 767.97,957 780.73,969.76 784.24,973.27 784.24,1000.21 780.73,1003.73 766.75,1017.71 v1(766.75,1029.22)
ADCIN2B_P: J2.25 R12B.1 R14B.1 | length 848.3
  TopLayer w4.5: v1(746.75,1009.22) 761.19,1009.22 787.19,983.22 919.23,983.22 927.45,991.45 930.74,994.73 930.74,1014.34 R12B.1@944.86,1028.46
  TopLayer w6.5: R12B.1@950.23,1028.46 R14B.1@995.14,1028.46 R14B.1@995.86,1029.17
  MidLayer1 w4: J2.25@300,877.06 301.06,876 368,876 374.49,882.49 440.51,882.49 527.03,969 763,969 772.24,978.24 772.24,995.24 758.26,1009.22 v1(746.75,1009.22)
ADCSPI.SCK: P1.H32 U3A.20 U3B.20 | length 120
  TopLayer w6.5: v1(1355.23,3763.15) U3A.20@1355.23,3808.05 ; v1(1814.92,1033.5) U3B.20@1814.92,1078.4 ; v2(2523.84,4584.33) 2523.84,4571.83 P1.H32@2536.34,4559.33
ADCSPI.SDI: P1.H31 U3A.21 U3B.21 | length 210.3
  TopLayer w5: v2(2498.84,4584.33) 2511.34,4571.83 2511.34,4534.33 P1.H31@2536.34,4509.33
  TopLayer w6.5: v1@1374.92,3748.15 U3A.21@1374.92,3808.05 ; v1@1834.61,1018.5 U3B.21@1834.61,1078.4
  other v1: 1834.61,1016.5 1374.92,3746.15
ADCSPI.SDO: P1.G28 R17A.2 R17B.2 U3A.46 U3B.46 | length 229.5
  TopLayer w6.5: U3A.46@1374.92,4122.08 v1(1374.92,4187.05) ; U3B.46@1834.61,1392.43 v1(1834.61,1457.4) ; v2(2561.34,4346.83) 2573.84,4346.83 P1.G28@2586.34,4359.33
  BottomLayer w6.5: v1(1374.92,4187.05) 1374.92,4221.49 R17A.2@1375.11,4221.68 ; v1(1834.61,1457.4) 1834.61,1491.84 R17B.2@1834.8,1492.03
BUCK1V8SYNC: P1.J37 | length 30.2
  TopLayer w6.5: v2(2473.84,4834.33) 2473.84,4821.83 P1.J37@2486.34,4809.33
BUCK3V3SYNC: P1.J36 | length 90.5
  TopLayer w5: v2(2448.84,4834.33) 2461.34,4821.83 2461.34,4784.33 P1.J36@2486.34,4759.33
BUCKSYNC: BuckSyncB.1 U12B.17 U14.2 | length 2276.6
  TopLayer w6.5: U12B.17@3473.52,1469.16 3561.86,1469.16 3580,1487.3 3580,1583.64 BuckSyncB.1@3624.99,1628.63 ; U14.2@3591.58,3488.56 v1@3663,3488.56
  BottomLayer w6.5: BuckSyncB.1@3624.99,1628.63 3624.99,2500.99 3730,2606 3730,3421.56 v1@3663,3488.56
  other v1: 3667,3488.56
BUCKSYNCA: BuckSyncA.1 R52.1 U12A.17 | length 909.6
  TopLayer w6.5: v1(3348.98,3577.14) R52.1@3348.98,3547.71 3327.39,3547.71 3297.26,3517.58 3297.26,3389.82 3391.74,3295.34 3510.66,3295.34 BuckSyncA.1@3624.99,3181.01 3580,3136.02 3580,3039.68 3561.86,3021.54 U12A.17@3473.52,3021.54
CARDACCLKA_N: R46A.2 U9A.3 | length 89.3
  TopLayer w4.5: U9A.3@2006.01,5037.6 v1(2006,5094.66)
  BottomLayer w4.5: v1(2006,5094.66) 2011.34,5089.32 R46A.2@2011.34,5064.66
CARDACCLKA_P: R46A.1 U9A.4 | length 89.3
  TopLayer w4.5: U9A.4@2056.01,5037.6 v1(2056.01,5094.66)
  BottomLayer w4.5: R46A.1@2050.71,5064.66 2050.71,5089.37 v1(2056.01,5094.66)
CARDACCLKB_N: R46B.2 U9B.3 | length 89.3
  TopLayer w4.5: U9B.3@2004.71,3559.89 v1(2004.7,3616.95)
  BottomLayer w4.5: v1(2004.7,3616.95) 2010.05,3611.61 R46B.2@2010.05,3586.95
CARDACCLKB_P: R46B.1 U9B.4 | length 89.3
  TopLayer w4.5: U9B.4@2054.71,3559.89 v1(2054.71,3616.95)
  BottomLayer w4.5: R46B.1@2049.42,3586.95 2049.42,3611.66 v1(2054.71,3616.95)
CARDACCLKC_N: R46C.2 U9C.3 | length 89.3
  TopLayer w4.5: U9C.3@2460.39,2304.25 v1(2460.39,2361.31)
  BottomLayer w4.5: v1(2460.39,2361.31) 2465.74,2355.96 R46C.2@2465.74,2331.31
CARDACCLKC_P: R46C.1 U9C.4 | length 89.3
  TopLayer w4.5: U9C.4@2510.4,2304.24 v1(2510.4,2361.31)
  BottomLayer w4.5: R46C.1@2505.11,2331.31 2505.11,2356.01 v1(2510.4,2361.31)
CARDACCLKD_N: R46D.2 U9D.3 | length 89.3
  TopLayer w4.5: U9D.3@2460.39,824.25 v1(2460.39,881.31)
  BottomLayer w4.5: v1(2460.39,881.31) 2465.74,875.96 R46D.2@2465.74,851.31
CARDACCLKD_P: R46D.1 U9D.4 | length 89.3
  TopLayer w4.5: U9D.4@2510.4,824.24 v1(2510.4,881.31)
  BottomLayer w4.5: R46D.1@2505.11,851.31 2505.11,876.01 v1(2510.4,881.31)
CARRIERCLKA: R34A.2 R45A.2 U5A.26 | length 1175.2
  TopLayer w6.5: U5A.26@1278.11,4829.65 v1@1341.94,4829.65
  MidLayer4 w10: v1@1339.94,4829.65 1339.59,4830 1325.86,4830 1310,4845.86 1310,5115 1330,5135 1893.82,5135 1916.07,5157.24 1979.08,5157.24 v1(2006,5184.16)
  BottomLayer w6.5: R34A.2@1302.11,4839.28 1311.74,4829.65 v1@1339.94,4829.65 ; v1(2006,5184.16) R45A.2@2006,5223.23
  other v1: 1340.94,4829.65
CARRIERCLKB: R34C.2 R45B.2 U5C.26 | length 1655
  TopLayer w6.5: U5C.26@1278.31,2885.02 v1@1342.14,2885.02
  MidLayer4 w10: v1@1342.14,2885.02 1324.67,2885.02 1309.7,2899.99 1309.7,3243.16 1287.57,3265.29 1287.57,3552.93 1338.02,3603.38 1371.38,3603.38 1436.79,3668.79 1859.25,3668.79 1930.46,3740 1963,3740 1996.55,3706.45 v1(2005.7,3706.45)
  BottomLayer w6.5: R34C.2@1302.31,2894.65 1311.94,2885.02 v1@1340.14,2885.02 ; v1(2005.7,3706.45) R45B.2@2005.7,3745.52
  other v1: 1341.14,2885.02
CARRIERCLKC: R34E.2 R45C.2 U5E.26 | length 1173.8
  TopLayer w6.5: U5E.26@1734.61,2097.34 v1@1798.44,2097.34
  MidLayer4 w10: v1@1794.33,2096.29 1793.98,2096.64 1780.26,2096.64 1764.39,2112.51 1764.39,2381.64 1784.75,2402 2348.57,2402 2370.46,2423.89 2431.47,2423.89 v1@2459.89,2452.31 ; v1@1796.09,2097.69 v1@1796.44,2097.34
  BottomLayer w6.5: R34E.2@1758.61,2106.97 1768.24,2097.34 v1@1796.44,2097.34 ; v1@2460.39,2452.81 R45C.2@2460.39,2489.87
  other v1: 1797.44,2097.34 2460.39,2451.81
CARRIERCLKD: R34G.2 R45D.2 U5G.26 | length 1686
  TopLayer w6.5: U5G.26@1734.61,150.63 v1@1798.44,150.63
  MidLayer4 w10: v1(1797.44,150.63) 1778.1,150.63 1764.39,164.34 1764.39,507.51 1742.26,529.64 1742.26,873.26 1804,935 2324.37,935 2393.72,1004.35 2429.85,1004.35 v1@2461.39,972.81
  BottomLayer w6.5: R34G.2@1758.61,160.26 1768.24,150.63 v1@1796.44,150.63 ; v1@2461.39,972.81 R45D.2@2461.39,1009.87
  other v1: 2461.39,971.81
CARSWITCHCTRL0A: U8A.7 U18A.14 U18A.15 | length 1709.7
  TopLayer w6.5: v1@2225.48,4996.64 U8A.7@2225.48,5050.52
  MidLayer4 w10: v1(969.17,4969.44) 958.56,4969.44 946.17,4981.83 946.17,5013.17 975,5042 1136.57,5042 1284.57,5190 1473.79,5190 1498.79,5165 1815,5165 1889,5239 2046.98,5239 2226.3,5059.69 2226.3,5041.66 2226.17,5041.53 2226.17,4997.33 v1@2225.48,4996.64
  BottomLayer w6.5: U18A.15@937.91,4943.85 v1@968.08,4943.85 ; U18A.14@937.91,4969.44 v1(969.17,4969.44) v1@972.08,4969.44
  other v1: 969.17,4943.85 2225.48,4995.64
CARSWITCHCTRL0B: U8B.7 U18C.14 U18C.15 | length 2483.3
  TopLayer w6.5: v1(2226.3,3519.98) U8B.7@2226.3,3573.86
  MidLayer4 w10: v1(969.37,2999.22) 957.22,2999.22 941.6,2983.6 941.6,2941.03 955,2927.63 955,2726.21 1021.21,2660 2030,2660 2125,2755 2125,3460 2162.36,3497.36 2203.67,3497.36 v1(2226.3,3519.98)
  BottomLayer w6.5: U18C.15@938.11,2999.22 v1@968.28,2999.22 ; U18C.14@938.11,3024.81 v1(969.37,3024.81) v1@972.28,3024.81
CARSWITCHCTRL0C: U8C.7 U18E.14 U18E.15 | length 1710.2
  TopLayer w6.5: v1@2681.99,2267.33 U8C.7@2681.99,2318.21
  MidLayer4 w10: v1(1425.68,2237.13) 1412.87,2237.13 1402.68,2247.32 1402.68,2283.68 1446.69,2327.69 1611.07,2327.69 1741.07,2457.69 1930.29,2457.69 1955.98,2432 2270.81,2432 2345.5,2506.69 2503.49,2506.69 2682.8,2327.38 2682.8,2309.35 2682.67,2309.22 2682.67,2265.02 v1(2681.99,2264.33)
  BottomLayer w6.5: U18E.15@1394.42,2211.54 v1@1424.59,2211.54 ; U18E.14@1394.42,2237.13 v1(1425.68,2237.13) v1@1428.59,2237.13
  other v1: 1425.68,2211.54
CARSWITCHCTRL0D: U8D.7 U18G.14 U18G.15 | length 2336.8
  TopLayer w6.5: v1(2681.99,787.33) U8D.7@2681.99,838.21
  MidLayer4 w10: v1(1425.68,264.83) 1414,264.83 1397.29,248.13 1397.29,205.38 1410.69,191.98 1410.69,-9.43 1464.26,-63 2267,-63 2576.94,246.94 2576.94,720.6 2622.33,765.99 2660.64,765.99 v1(2681.99,787.33)
  BottomLayer w6.5: U18G.15@1394.42,264.83 v1@1424.59,264.83 ; U18G.14@1394.42,290.43 v1(1425.68,290.43) v1@1428.59,290.43
CARSWITCHCTRL1A: U8A.8 U18A.6 U18A.7 | length 1935
  TopLayer w6.5: v1(2245.17,5016.58) U8A.8@2245.17,5050.52
  MidLayer4 w10: v1@758.14,4943.85 854.28,5040 906.42,5040 929.42,5063 1136.35,5063 1278.35,5205 1480,5205 1505,5180 1800,5180 1880,5260 2048.43,5260 2164.43,5144 2225.42,5144 2265.67,5103.75 2265.67,5050.67 2245.17,5030.17 v1(2245.17,5016.58)
  BottomLayer w6.5: U18A.6@788.31,4943.85 758.14,4943.85 758.14,4961.85 765.73,4969.44 U18A.7@788.31,4969.44
  other v1: 757.14,4943.85
CARSWITCHCTRL1B: U8B.8 U18C.6 U18C.7 | length 2679.4
  TopLayer w6.5: v1(2245.98,3539.92) U8B.8@2245.98,3573.86
  MidLayer4 w10: v1(757.34,2999.22) 781.58,2999.22 825.8,2955 906.42,2955 940,2921.42 940,2720 1015,2645 2045,2645 2140,2740 2140,3453.79 2168.57,3482.36 2225.72,3482.36 2245.98,3502.62 v1(2245.98,3539.92)
  BottomLayer w6.5: U18C.6@788.51,2999.22 758.34,2999.22 758.34,3017.22 765.93,3024.81 U18C.7@788.51,3024.81
CARSWITCHCTRL1C: U8C.8 U18E.6 U18E.7 | length 1936.3
  TopLayer w6.5: v1(2701.67,2284.27) U8C.8@2701.67,2318.21
  MidLayer4 w10: v1@1214.14,2211.04 1310.79,2307.69 1362.93,2307.69 1397.93,2342.69 1604.86,2342.69 1734.86,2472.69 1936.5,2472.69 1962.2,2447 2255.81,2447 2336.5,2527.69 2504.93,2527.69 2620.93,2411.69 2681.92,2411.69 2722.17,2371.44 2722.17,2307.77 2701.67,2287.27 v1(2701.67,2284.27)
  BottomLayer w6.5: U18E.6@1244.81,2211.54 1214.64,2211.54 1214.64,2229.54 1222.23,2237.13 U18E.7@1244.81,2237.13
  other v1: 1213.64,2211.54
CARSWITCHCTRL1D: U8D.8 U18G.6 U18G.7 | length 2530.2
  TopLayer w6.5: v1(2701.67,804.27) U8D.8@2701.67,838.21
  MidLayer4 w10: v1@1214.64,264.83 1236.01,264.83 1281.49,219.35 1362.11,219.35 1395.69,185.77 1395.69,-15.65 1458.04,-78 2273.21,-78 2591.94,240.72 2591.94,714.39 2626.9,749.35 2684.05,749.35 2700.99,766.29 2700.99,806.58 v1@2701.67,807.27
  BottomLayer w6.5: U18G.6@1244.81,264.83 1214.64,264.83 1214.64,282.83 1222.23,290.43 U18G.7@1244.81,290.43
  other v1: 1213.64,264.83
CARSWITCHCTRL2A: U8A.9 U19A.14 U19A.15 | length 2062.3
  TopLayer w6.5: U8A.9@2274.69,5080.05 v1(2328.57,5080.05)
  MidLayer4 w10: v1(735.28,4968.65) 725,4978.93 725,5026.93 776.86,5078.79 776.86,5159.82 917.04,5300 1815,5300 1839.66,5275.34 2059.66,5275.34 2175,5160 2230.63,5160 2280.67,5109.96 2280.67,5094.33 2294.95,5080.05 v1(2328.57,5080.05)
  BottomLayer w6.5: U19A.15@700.11,4943.06 722.69,4943.06 730.28,4950.65 730.28,4968.65 U19A.14@700.11,4968.65
CARSWITCHCTRL2B: U8B.9 U19C.14 U19C.15 | length 2954.1
  TopLayer w6.5: U8B.9@2275.51,3603.38 v1(2329.38,3603.38)
  MidLayer4 w10: v1(735.48,3024.02) 721.02,3024.02 695,2998 695,2946.21 705,2936.21 705,2736.21 811.21,2630 2090,2630 2202.99,2742.99 2202.99,3419.21 2329.38,3545.6 v1(2329.38,3603.38)
  BottomLayer w6.5: U19C.15@700.31,2998.43 722.89,2998.43 730.48,3006.02 730.48,3024.02 U19C.14@700.31,3024.02
CARSWITCHCTRL2C: U8C.9 U19E.14 U19E.15 | length 2066
  TopLayer w6.5: U8C.9@2731.2,2347.74 v1(2787.07,2347.74)
  MidLayer4 w10: v1@1192,2236.34 1192,2304 1233.37,2345.37 1233.37,2427.51 1383.55,2577.69 2261.5,2577.69 2296.16,2543.03 2516.16,2543.03 2631.5,2427.69 2687.13,2427.69 2737.17,2377.65 2737.17,2362.03 2751.46,2347.74 v1(2787.07,2347.74)
  BottomLayer w6.5: U19E.15@1156.61,2210.75 1179.19,2210.75 1186.78,2218.34 1186.78,2236.34 U19E.14@1156.61,2236.34
  other v1: 1191.78,2236.34
CARSWITCHCTRL2D: U8D.9 U19G.14 U19G.15 | length 2792.2
  TopLayer w6.5: U8D.9@2731.2,867.74 v1(2782.07,867.74)
  MidLayer4 w10: v1(1191.78,289.63) 1176.94,289.63 1150.69,263.38 1150.69,210.57 1160.69,200.57 1160.69,0.57 1254.26,-93 2279.43,-93 2606.94,234.51 2606.94,267.8 2618.07,278.93 2642.72,278.93 2658.68,294.9 2658.68,683.56 2782.07,806.95 v1(2782.07,867.74)
  BottomLayer w6.5: U19G.15@1156.61,264.04 1179.19,264.04 1186.78,271.63 1186.78,289.63 U19G.14@1156.61,289.63
CARSWITCHCTRL3A: U8A.10 U19A.6 U19A.7 | length 2191.9
  TopLayer w6.5: U8A.10@2274.69,5099.73 v1(2308.63,5099.73)
  MidLayer4 w10: v1(519.24,4968.65) 532.65,4968.65 ; 533.65,4968.65 600.65,5035.65 712.51,5035.65 761.86,5085 761.86,5172.34 908.52,5319 2071,5319 2085,5305 2085,5277.82 2187.82,5175 2244,5175 2308.63,5110.37 v1(2308.63,5099.73)
  BottomLayer w6.5: v1@516.33,4968.65 v1(519.24,4968.65) ; v1(519.24,4943.06) U19A.6@549.5,4943.06 ; v1(519.24,4968.65) U19A.7@546.59,4968.65
CARSWITCHCTRL3B: U8B.10 U19C.6 U19C.7 | length 3120.4
  TopLayer w6.5: U8B.10@2275.51,3623.07 v1(2309.45,3623.07)
  MidLayer4 w10: v1(519.44,3024.02) 539,3024.02 ; 540,3024.02 559.51,3004.51 559.51,2981.16 585.66,2955 665,2955 690,2930 690,2730 805,2615 2100,2615 2220,2735 2220,3415 2350,3545 2350,3613.07 2340,3623.07 v1(2309.45,3623.07)
  BottomLayer w6.5: v1@516.53,3024.02 v1(519.44,3024.02) ; v1(519.44,2998.43) U19C.6@549.7,2998.43 ; v1(519.44,3024.02) U19C.7@546.79,3024.02
CARSWITCHCTRL3C: U8C.10 U19E.6 U19E.7 | length 2194.1
  TopLayer w6.5: U8C.10@2731.2,2367.42 v1(2766.14,2367.42)
  MidLayer4 w10: v1@976.75,2236.34 990.15,2236.34 1057.15,2303.34 1169.01,2303.34 1218.37,2352.69 1218.37,2440.04 1371.02,2592.69 2521.5,2592.69 2541.5,2572.69 2541.5,2545.51 2644.32,2442.69 2693.35,2442.69 2766.14,2369.9 v1(2766.14,2367.42)
  BottomLayer w6.5: v1@972.84,2236.34 v1(975.75,2236.34) ; v1(975.75,2210.75) U19E.6@1006.01,2210.75 ; v1(975.75,2236.34) U19E.7@1003.1,2236.34
CARSWITCHCTRL3D: U8D.10 U19G.6 U19G.7 | length 2945.2
  TopLayer w6.5: U8D.10@2731.2,887.42 v1(2765.14,887.42)
  MidLayer4 w10: v1(975.75,289.63) 994.43,289.63 1015.2,268.86 1015.2,245.51 1041.35,219.35 1120.69,219.35 1145.69,194.35 1145.69,-5.65 1248.04,-108 2285.64,-108 2675.69,282.05 2675.69,679.35 2805.69,809.35 2805.69,877.42 2795.69,887.42 v1(2765.14,887.42)
  BottomLayer w6.5: v1@972.84,289.63 v1(975.75,289.63) ; v1(975.75,264.04) U19G.6@1006.01,264.04 ; v1(975.75,289.63) U19G.7@1003.1,289.63
CH1_DAC_DAT0: U17A.26
CH1_DAC_DAT1: U17A.27
CH1_DAC_DAT2: U17A.29
CH1_DAC_DAT3: U17A.30
CH1_DAC_DAT4: U17A.32
CH1_DAC_DAT5: U17A.33
CH1_DAC_DAT6: U17A.35
CH1_DAC_DAT7: U17A.36
CH1_DAC_DAT8: U17A.37
CH1_DAC_DAT9: U17A.38
CH1_DAC_DAT10: U17A.40
CH1_DAC_DAT11: U17A.41
CH1_DAC_DAT12: U17A.43
CH1_DAC_DAT13: U17A.44
CH1_DAC_DAT14: U17A.46
CH1_DAC_DAT15: U17A.47
CH2_DAC_DAT0: U17B.26
CH2_DAC_DAT1: U17B.27
CH2_DAC_DAT2: U17B.29
CH2_DAC_DAT3: U17B.30
CH2_DAC_DAT4: U17B.32
CH2_DAC_DAT5: U17B.33
CH2_DAC_DAT6: U17B.35
CH2_DAC_DAT7: U17B.36
CH2_DAC_DAT8: U17B.37
CH2_DAC_DAT9: U17B.38
CH2_DAC_DAT10: U17B.40
CH2_DAC_DAT11: U17B.41
CH2_DAC_DAT12: U17B.43
CH2_DAC_DAT13: U17B.44
CH2_DAC_DAT14: U17B.46
CH2_DAC_DAT15: U17B.47
CH3_DAC_DAT0: U17C.26
CH3_DAC_DAT1: U17C.27
CH3_DAC_DAT2: U17C.29
CH3_DAC_DAT3: U17C.30
CH3_DAC_DAT4: U17C.32
CH3_DAC_DAT5: U17C.33
CH3_DAC_DAT6: U17C.35
CH3_DAC_DAT7: U17C.36
CH3_DAC_DAT8: U17C.37
CH3_DAC_DAT9: U17C.38
CH3_DAC_DAT10: U17C.40
CH3_DAC_DAT11: U17C.41
CH3_DAC_DAT12: U17C.43
CH3_DAC_DAT13: U17C.44
CH3_DAC_DAT14: U17C.46
CH3_DAC_DAT15: U17C.47
CH4_DAC_DAT0: U17D.26
CH4_DAC_DAT1: U17D.27
CH4_DAC_DAT2: U17D.29
CH4_DAC_DAT3: U17D.30
CH4_DAC_DAT4: U17D.32
CH4_DAC_DAT5: U17D.33
CH4_DAC_DAT6: U17D.35
CH4_DAC_DAT7: U17D.36
CH4_DAC_DAT8: U17D.37
CH4_DAC_DAT9: U17D.38
CH4_DAC_DAT10: U17D.40
CH4_DAC_DAT11: U17D.41
CH4_DAC_DAT12: U17D.43
CH4_DAC_DAT13: U17D.44
CH4_DAC_DAT14: U17D.46
CH4_DAC_DAT15: U17D.47
CH12_ADC_DAT.DATACLOCKOUT_N: U3A.35 | length 71.8
  TopLayer w6.5: U3A.35@1501,3994.13 v1(1572.84,3994.13)
CH12_ADC_DAT.DATACLOCKOUT_P: U3A.36 | length 55.8
  TopLayer w6.5: U3A.36@1498,4013.81 v1(1553.84,4013.81)
CH12_ADC_DAT.ENC_N: C18A.2
CH12_ADC_DAT.ENC_P: C8A.2
CH12_ADC_DAT.FRAMESTART_N: U3A.31 | length 74.8
  TopLayer w6.5: U3A.31@1498,3915.39 v1(1572.84,3915.39)
CH12_ADC_DAT.FRAMESTART_P: U3A.32 | length 55.8
  TopLayer w6.5: U3A.32@1498,3935.07 v1(1553.84,3935.07)
CH12_ADC_DAT.OUT1A_N: U3A.43 | length 46
  TopLayer w6.5: U3A.43@1433.97,4122.08 v1(1433.97,4168.05)
CH12_ADC_DAT.OUT1A_P: U3A.44 | length 65
  TopLayer w6.5: U3A.44@1414.29,4122.08 v1(1414.29,4187.05)
CH12_ADC_DAT.OUT1B_N: U3A.41 | length 46
  TopLayer w6.5: U3A.41@1473.34,4122.08 v1(1473.34,4168.05)
CH12_ADC_DAT.OUT1B_P: U3A.42 | length 65
  TopLayer w6.5: U3A.42@1453.66,4122.08 v1(1453.66,4187.05)
CH12_ADC_DAT.OUT2A_N: U3A.29 | length 74.8
  TopLayer w6.5: U3A.29@1498,3876.02 v1(1572.84,3876.02)
CH12_ADC_DAT.OUT2A_P: U3A.30 | length 55.8
  TopLayer w6.5: U3A.30@1498,3895.7 v1(1553.84,3895.7)
CH12_ADC_DAT.OUT2B_N: U3A.27 | length 74.8
  TopLayer w6.5: U3A.27@1498,3836.65 v1(1572.84,3836.65)
CH12_ADC_DAT.OUT2B_P: U3A.28 | length 55.8
  TopLayer w6.5: U3A.28@1498,3856.33 v1(1553.84,3856.33)
CH34_ADC_DAT.DATACLOCKOUT_N: U3B.35 | length 71.8
  TopLayer w6.5: U3B.35@1960.69,1264.48 v1(2032.53,1264.48)
CH34_ADC_DAT.DATACLOCKOUT_P: U3B.36 | length 55.8
  TopLayer w6.5: U3B.36@1957.69,1284.17 v1(2013.53,1284.17)
CH34_ADC_DAT.ENC_N: C18B.2
CH34_ADC_DAT.ENC_P: C8B.2
CH34_ADC_DAT.FRAMESTART_N: U3B.31 | length 74.8
  TopLayer w6.5: U3B.31@1957.69,1185.74 v1(2032.53,1185.74)
CH34_ADC_DAT.FRAMESTART_P: U3B.32 | length 55.8
  TopLayer w6.5: U3B.32@1957.69,1205.43 v1(2013.53,1205.43)
CH34_ADC_DAT.OUT1A_N: U3B.43 | length 46
  TopLayer w6.5: U3B.43@1893.66,1392.43 v1(1893.66,1438.4)
CH34_ADC_DAT.OUT1A_P: U3B.44 | length 65
  TopLayer w6.5: U3B.44@1873.98,1392.43 v1(1873.98,1457.4)
CH34_ADC_DAT.OUT1B_N: U3B.41 | length 46
  TopLayer w6.5: U3B.41@1933.03,1392.43 v1(1933.03,1438.4)
CH34_ADC_DAT.OUT1B_P: U3B.42 | length 65
  TopLayer w6.5: U3B.42@1913.35,1392.43 v1(1913.35,1457.4)
CH34_ADC_DAT.OUT2A_N: U3B.29 | length 74.8
  TopLayer w6.5: U3B.29@1957.69,1146.37 v1(2032.53,1146.37)
CH34_ADC_DAT.OUT2A_P: U3B.30 | length 55.8
  TopLayer w6.5: U3B.30@1957.69,1166.05 v1(2013.53,1166.05)
CH34_ADC_DAT.OUT2B_N: U3B.27 | length 74.8
  TopLayer w6.5: U3B.27@1957.69,1107 v1(2032.53,1107)
CH34_ADC_DAT.OUT2B_P: U3B.28 | length 55.8
  TopLayer w6.5: U3B.28@1957.69,1126.68 v1(2013.53,1126.68)
DACDATA0A: RT2A.16 U5A.14 U5B.14 | length 1093.3
  TopLayer w6.5: U5B.14@1548.86,4644.79 v1(1610.69,4644.79) ; U5A.14@1549.11,5111.45 v1(1610.94,5111.45)
  MidLayer4 w10: v1(1610.69,4644.79) 1490.79,4644.79 1465,4619 1443,4619 1359.94,4702.06 1359.94,4981.83 1489.56,5111.45 v1(1610.94,5111.45)
  BottomLayer w6.5: v1(1610.94,5111.45) 1655.2,5111.45 1667.99,5098.66 RT2A.16@1695,5098.66
DACDATA0C: RT2B.16 U5C.14 U5D.14 | length 1094
  TopLayer w6.5: U5C.14@1549.68,3168.12 v1(1611.51,3168.12) ; U5D.14@1549.92,3634.79 v1(1611.75,3634.79)
  MidLayer4 w10: v1(1611.51,3168.12) 1495.54,3168.12 1470.42,3143 1441,3143 1360.75,3223.25 1360.75,3505.17 1490.37,3634.79 v1(1611.75,3634.79)
  BottomLayer w6.5: v1(1611.75,3634.79) 1656.01,3634.79 1668.8,3622 RT2B.16@1695.81,3622
DACDATA0E: RT2C.16 U5E.14 U5F.14 | length 1118.4
  TopLayer w6.5: U5F.14@2005.37,1912.48 v1@2067.2,1912.48 ; U5E.14@2005.61,2379.14 v1(2067.44,2379.14)
  MidLayer4 w10: v1@2067.2,1912.48 1970.49,1912.48 1930.64,1872.63 1890.7,1872.63 1816.44,1946.88 1816.44,2249.52 1946.06,2379.14 v1(2067.44,2379.14)
  BottomLayer w6.5: v1(2067.44,2379.14) 2111.7,2379.14 2124.49,2366.35 RT2C.16@2151.5,2366.35
  other v1: 2068.2,1912.48
DACDATA0G: RT2D.16 U5G.14 U5H.14 | length 1122.6
  TopLayer w6.5: U5G.14@2005.37,432.48 v1(2067.2,432.48) ; U5H.14@2005.61,899.14 v1(2067.44,899.14)
  MidLayer4 w10: v1(2067.2,432.48) 1970.69,432.48 1930.21,392 1891.33,392 1816.44,466.88 1816.44,775.91 1915.87,875.34 1922.26,875.34 1946.06,899.14 v1(2067.44,899.14)
  BottomLayer w6.5: v1(2067.44,899.14) 2111.7,899.14 2124.49,886.35 RT2D.16@2151.5,886.35
DACDATA1A: RT2A.15 U5A.13 U5B.13 | length 1134.6
  TopLayer w6.5: U5B.13@1548.86,4619.19 1635.69,4619.19 1640,4623.49 v1(1640,4625) ; U5A.13@1549.11,5085.85 1635.94,5085.85 1640.25,5090.15 v1(1640.25,5091.66)
  MidLayer4 w10: v1(1640,4625) 1640,4650 1626.21,4663.79 1436.21,4663.79 1374.94,4725.06 1374.94,4973.34 1487.45,5085.85 1634.43,5085.85 v1(1640.25,5091.66)
  BottomLayer w6.5: v1(1640.25,5091.66) 1641.33,5091.66 1658.94,5074.05 RT2A.15@1695,5074.05
DACDATA1C: RT2B.15 U5C.13 U5D.13 | length 1130.8
  TopLayer w6.5: U5C.13@1549.68,3142.52 1636.51,3142.52 1640.81,3146.83 v1(1640.81,3148.34) ; U5D.13@1549.92,3609.19 1636.75,3609.19 1641.06,3613.49 v1(1641.06,3615)
  MidLayer4 w10: v1(1640.81,3148.34) 1640.81,3173.34 1627.03,3187.12 1445.88,3187.12 1375.75,3257.25 1375.75,3498.95 1485.99,3609.19 1635.25,3609.19 v1(1641.06,3615)
  BottomLayer w6.5: v1(1641.06,3615) 1642.14,3615 1659.75,3597.39 RT2B.15@1695.81,3597.39
DACDATA1E: RT2C.15 U5E.13 U5F.13 | length 1195.5
  TopLayer w6.5: U5F.13@2005.37,1886.88 2092.2,1886.88 2096.5,1891.18 v1(2096.5,1892.69) ; U5E.13@2005.61,2353.54 2092.44,2353.54 2096.75,2357.85 v1(2096.75,2359.35)
  MidLayer4 w10: v1(2096.5,1892.69) 2096.5,1917.69 2082.72,1931.48 1968.28,1931.48 1924.43,1887.63 1896.91,1887.63 1831.44,1953.1 1831.44,2243.31 1947.49,2359.35 v1(2096.75,2359.35)
  BottomLayer w6.5: v1(2096.75,2359.35) 2097.83,2359.35 2115.44,2341.74 RT2C.15@2151.5,2341.74
DACDATA1G: RT2D.15 U5G.13 U5H.13 | length 1199.8
  TopLayer w6.5: U5G.13@2005.37,406.88 2092.2,406.88 2096.5,411.18 v1(2096.5,412.69) ; U5H.13@2005.61,873.54 2092.44,873.54 2096.75,877.85 v1(2096.75,879.35)
  MidLayer4 w10: v1(2096.5,412.69) 2096.5,437.69 2082.72,451.48 1968.48,451.48 1924,407 1897.54,407 1831.44,473.1 1831.44,769.7 1922.08,860.34 1928.48,860.34 1941.68,873.54 2090.94,873.54 v1(2096.75,879.35)
  BottomLayer w6.5: v1(2096.75,879.35) 2097.83,879.35 2115.44,861.74 RT2D.15@2151.5,861.74
DACDATA2A: RT2A.14 U5A.12 U5B.12 | length 1128.9
  TopLayer w6.5: U5B.12@1548.86,4593.59 v1(1610.69,4593.59) ; U5A.12@1549.11,5060.25 v1(1610.94,5060.25)
  MidLayer4 w10: v1(1610.69,4593.59) 1611.11,4594 1662.38,4594 1679.69,4611.32 1679.69,4631.52 1632.43,4678.79 1446.15,4678.79 1389.94,4735 1389.94,4962.94 1484.65,5057.65 1608.34,5057.65 v1(1610.94,5060.25)
  BottomLayer w6.5: v1(1610.94,5060.25) 1611.35,5060.66 1651.12,5060.66 1657.41,5054.37 RT2A.14@1695,5054.37
DACDATA2C: RT2B.14 U5C.12 U5D.12 | length 1129.7
  TopLayer w6.5: U5C.12@1549.68,3116.92 v1(1611.51,3116.92) ; U5D.12@1549.92,3583.59 v1(1611.75,3583.59)
  MidLayer4 w10: v1(1611.51,3116.92) 1611.92,3117.34 1663.19,3117.34 1680.51,3134.65 1680.51,3154.86 1633.24,3202.12 1452.09,3202.12 1390.75,3263.46 1390.75,3492.74 1479,3580.99 1609.15,3580.99 v1(1611.75,3583.59)
  BottomLayer w6.5: v1(1611.75,3583.59) 1612.17,3584 1651.93,3584 1658.22,3577.71 RT2B.14@1695.81,3577.71
DACDATA2E: RT2C.14 U5E.12 U5F.12 | length 1174.5
  TopLayer w6.5: U5F.12@2005.37,1861.28 v1@2067.2,1861.28 ; U5E.12@2005.61,2327.94 v1(2067.44,2327.94)
  MidLayer4 w10: v1@2067.2,1861.28 2067.61,1861.69 2118.88,1861.69 2136.2,1879.01 2136.2,1899.21 2088.93,1946.48 1956.83,1946.48 1937.03,1926.68 1879.08,1926.68 1846.44,1959.31 1846.44,2237.09 1937.29,2327.94 v1(2067.44,2327.94)
  BottomLayer w6.5: v1(2067.44,2327.94) 2067.86,2328.35 2107.62,2328.35 2113.91,2322.06 RT2C.14@2151.5,2322.06
  other v1: 2068.2,1861.28
DACDATA2G: RT2D.14 U5G.12 U5H.12 | length 1173.8
  TopLayer w6.5: U5G.12@2005.37,381.28 v1(2067.2,381.28) ; U5H.12@2005.61,847.94 v1(2067.44,847.94)
  MidLayer4 w10: v1(2067.2,381.28) 2067.61,381.69 2118.88,381.69 2136.2,399.01 2136.2,419.21 2088.93,466.48 1956.83,466.48 1942.35,452 1873.76,452 1846.44,479.31 1846.44,763.48 1928.3,845.34 2064.84,845.34 v1(2067.44,847.94)
  BottomLayer w6.5: v1(2067.44,847.94) 2067.86,848.35 2107.62,848.35 2113.91,842.06 RT2D.14@2151.5,842.06
DACDATA3A: RT2A.13 U5A.11 U5B.11 | length 1143
  TopLayer w6.5: U5B.11@1548.86,4567.99 1635.99,4567.99 v1(1643,4575) ; U5A.11@1549.11,5034.65 1636.23,5034.65 v1(1643.25,5041.66)
  MidLayer4 w10: v1@1642.71,4575 1664.59,4575 1694.69,4605.1 1694.69,4637.73 1638.64,4693.79 1452.37,4693.79 1404.94,4741.21 1404.94,4914.94 1524.85,5034.85 1636.44,5034.85 v1(1643.25,5041.66)
  BottomLayer w6.5: v1(1643.25,5041.66) 1650.22,5034.68 RT2A.13@1695,5034.68
DACDATA3C: RT2B.13 U5C.11 U5D.11 | length 1140.8
  TopLayer w6.5: U5C.11@1549.68,3091.32 1636.8,3091.32 v1(1643.81,3098.34) ; U5D.11@1549.92,3557.99 1637.05,3557.99 v1(1644.06,3565)
  MidLayer4 w10: v1@1643.52,3098.34 v1(1643.81,3098.34) 1665.41,3098.34 1695.51,3128.44 1695.51,3161.07 1639.45,3217.12 1458.3,3217.12 1405.75,3269.67 1405.75,3439.75 1524.19,3558.19 1637.25,3558.19 v1(1644.06,3565)
  BottomLayer w6.5: v1(1644.06,3565) 1651.04,3558.02 RT2B.13@1695.81,3558.02
DACDATA3E: RT2C.13 U5E.11 U5F.11 | length 1184.9
  TopLayer w6.5: U5F.11@2005.37,1835.68 2092.49,1835.68 v1(2099.5,1842.69) ; U5E.11@2005.61,2302.34 2092.74,2302.34 v1(2099.75,2309.35)
  MidLayer4 w10: v1@2099.21,1842.69 v1(2099.5,1842.69) 2121.09,1842.69 2151.2,1872.79 2151.2,1905.42 2095.14,1961.48 1950.61,1961.48 1930.81,1941.68 1885.29,1941.68 1861.44,1965.52 1861.44,2182.82 1982.62,2304 2094.4,2304 v1(2099.75,2309.35)
  BottomLayer w6.5: v1(2099.75,2309.35) 2106.73,2302.37 RT2C.13@2151.5,2302.37
DACDATA3G: RT2D.13 U5G.11 U5H.11 | length 1181.7
  TopLayer w6.5: U5G.11@2005.37,355.68 2092.49,355.68 v1(2099.5,362.69) ; U5H.11@2005.61,822.34 2092.74,822.34 v1(2099.75,829.35)
  MidLayer4 w10: v1(2099.5,362.69) 2099.21,362.69 2121.09,362.69 2151.2,392.79 2151.2,425.42 2095.14,481.48 1950.61,481.48 1936.13,467 1879.97,467 1861.44,485.52 1861.44,704.44 1979.54,822.54 2092.94,822.54 v1(2099.75,829.35)
  BottomLayer w6.5: v1(2099.75,829.35) 2106.73,822.37 RT2D.13@2151.5,822.37
DACDATA4A: RT2A.12 U5A.10 U5B.10 | length 1109.3
  TopLayer w6.5: U5B.10@1548.86,4542.39 v1(1610.69,4542.39) ; U5A.10@1549.11,5009.05 v1(1610.94,5009.05)
  MidLayer4 w10: v1(1610.69,4542.39) 1661.96,4542.39 1709.69,4590.12 1709.69,4643.95 1644.85,4708.79 1458.58,4708.79 1419.94,4747.43 1419.94,4908.73 1520.26,5009.05 v1(1610.94,5009.05)
  BottomLayer w6.5: v1(1610.94,5009.05) 1616.89,5015 RT2A.12@1695,5015
DACDATA4C: RT2B.12 U5C.10 U5D.10 | length 1107.1
  TopLayer w6.5: U5C.10@1549.68,3065.72 v1(1611.51,3065.72) ; U5D.10@1549.92,3532.39 v1(1611.75,3532.39)
  MidLayer4 w10: v1(1611.51,3065.72) 1662.78,3065.72 1710.51,3113.45 1710.51,3167.28 1645.67,3232.12 1464.51,3232.12 1420.75,3275.89 1420.75,3433.54 1519.6,3532.39 v1(1611.75,3532.39)
  BottomLayer w6.5: v1(1611.75,3532.39) 1617.71,3538.34 RT2B.12@1695.81,3538.34
DACDATA4E: RT2C.12 U5E.10 U5F.10 | length 1151.2
  TopLayer w6.5: U5F.10@2005.37,1810.08 v1@2067.2,1810.08 ; U5E.10@2005.61,2276.74 v1(2067.44,2276.74)
  MidLayer4 w10: v1@2067.2,1810.08 2118.47,1810.08 2166.2,1857.81 2166.2,1911.64 2101.36,1976.48 1944.4,1976.48 1924.6,1956.68 1891.5,1956.68 1876.44,1971.74 1876.44,2176.61 1976.58,2276.74 v1(2067.44,2276.74)
  BottomLayer w6.5: v1(2067.44,2276.74) 2073.4,2282.69 RT2C.12@2151.5,2282.69
  other v1: 2068.2,1810.08